# EAGLE board Whole circuit (EAGLE 7.6.0)

Size 73.58 x 63.39 mm. Coordinates in mm from the lower left corner, seen from the top.
Outline: 0,0 56.82,0 56.82,53.33 0,53.33 0,0
Copper layers (1*16): Top 0.035mm / dielectric 1.5mm / Bottom 0.035mm
Design rules "default": minimum track width 10mil, minimum drill 24mil, track to track 8mil, track to pad 8mil, pad to pad 8mil, via to via 8mil, smd to smd 8mil, copper to edge 40mil, drill to drill 8mil, minimum pad ring 10mil, minimum via ring 8mil, stop-mask expansion 4mil, vias tented up to drill 0mil, thermal gap 10mil

## Footprints (pad centres in the part's own frame; a part is rotated, then mirrored left to right if it is on the bottom)
LED-RGB-THRU = drill 0.762 pad 0.889 long: 1 1.905,0; 2 0.635,0; 3 -0.635,0; 4 -1.905,0
PHOTORESISTOR-2.54 = drill 1 pad 1.5: P$1 -1.27,0; P$2 1.27,0
0207/10 = drill 0.813 octagon: 1 -5.08,0; 2 5.08,0
ARDUINO_UNO = drill 1.016 pad 1.88: 0 63.5,50.8; 1 60.96,50.8; 2 58.42,50.8; 3 55.88,50.8; 3.3V 35.56,2.54; 4 53.34,50.8; 5 50.8,50.8; 5V 38.1,2.54; 6 48.26,50.8; 7 45.72,50.8; 8 41.656,50.8; 9 39.116,50.8; 10 36.576,50.8; 11 34.036,50.8; 12 31.496,50.8; 13 28.956,50.8; A0 50.8,2.54; A1 53.34,2.54; A2 55.88,2.54; A3 58.42,2.54; A4 60.96,2.54; A5 63.5,2.54; AREF 23.876,50.8; GND 26.416,50.8; GND. 43.18,2.54; GND.. 40.64,2.54; I/OREF 30.48,2.54; N/C 27.94,2.54; RESET 33.02,2.54; SCL 18.796,50.8; SDA 21.336,50.8; VIN 45.72,2.54 | hole 3.2: 66.04,7.62; 66.04,35.56; 15.24,50.8; 13.97,2.54
TO92 = drill 0.813 octagon: 1 1.27,0; 2 0,1.905; 3 -1.27,0

## Placement (x,y rotation side)
DStatus Led  [LED-RGB-THRU]  5,48.18 0 top
QLight sensor  [PHOTORESISTOR-2.54]  5,22.78 0 top
RResistance for phototransistor  10k‎Ω  [0207/10]  5,60.88 0 top
UMain Arduino  [ARDUINO_UNO]  5,10.08 0 top
UTemperature sensor  [TO92]  5,35.48 0 top

## Library data of the parts
DStatus Led QLight sensor RResistance for phototransistor UMain Arduino UTemperature sensor = AUTODESK_CIRCUITS_BREADBOARD

## Nets
N$1: UMain Arduino.A0 UTemperature sensor.2
N$2: DStatus Led.3 UMain Arduino.6
N$3: DStatus Led.1 UMain Arduino.5
N$4: UMain Arduino.2
N$5: UMain Arduino.3
N$6: UMain Arduino.4
N$7: DStatus Led.4 UMain Arduino.7
N$8: QLight sensor.P$1 RResistance for phototransistor.2 UMain Arduino.A1
N$9: DStatus Led.2 RResistance for phototransistor.1 UMain Arduino.GND.. UTemperature sensor.1
N$10: QLight sensor.P$2 UMain Arduino.5V UTemperature sensor.3

## Tracks (layer width: path | path; a pad name or v marks a point on that pad's centre or on a via)
N$1  (1 unrouted)
N$2  (1 unrouted)
N$3  (1 unrouted)
N$7  (1 unrouted)
N$8  (2 unrouted)
N$9  (3 unrouted)
N$10  (2 unrouted)